# EAGLE board mordomusesp8266 (EAGLE 9.4.2)
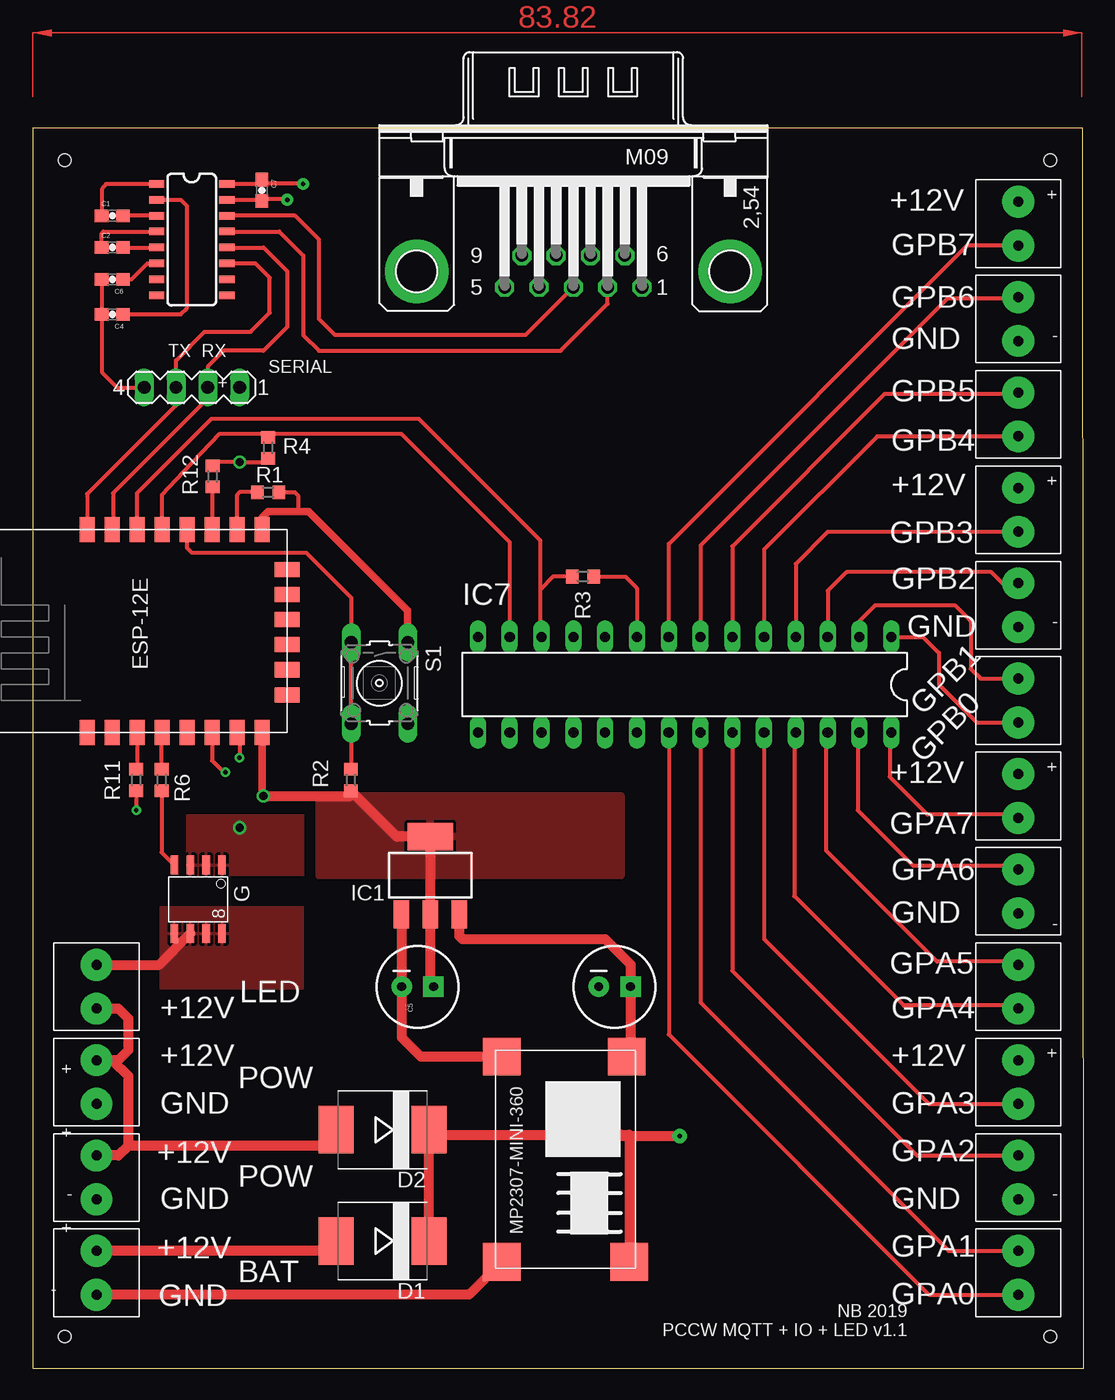
[diagram p0: board, top side]
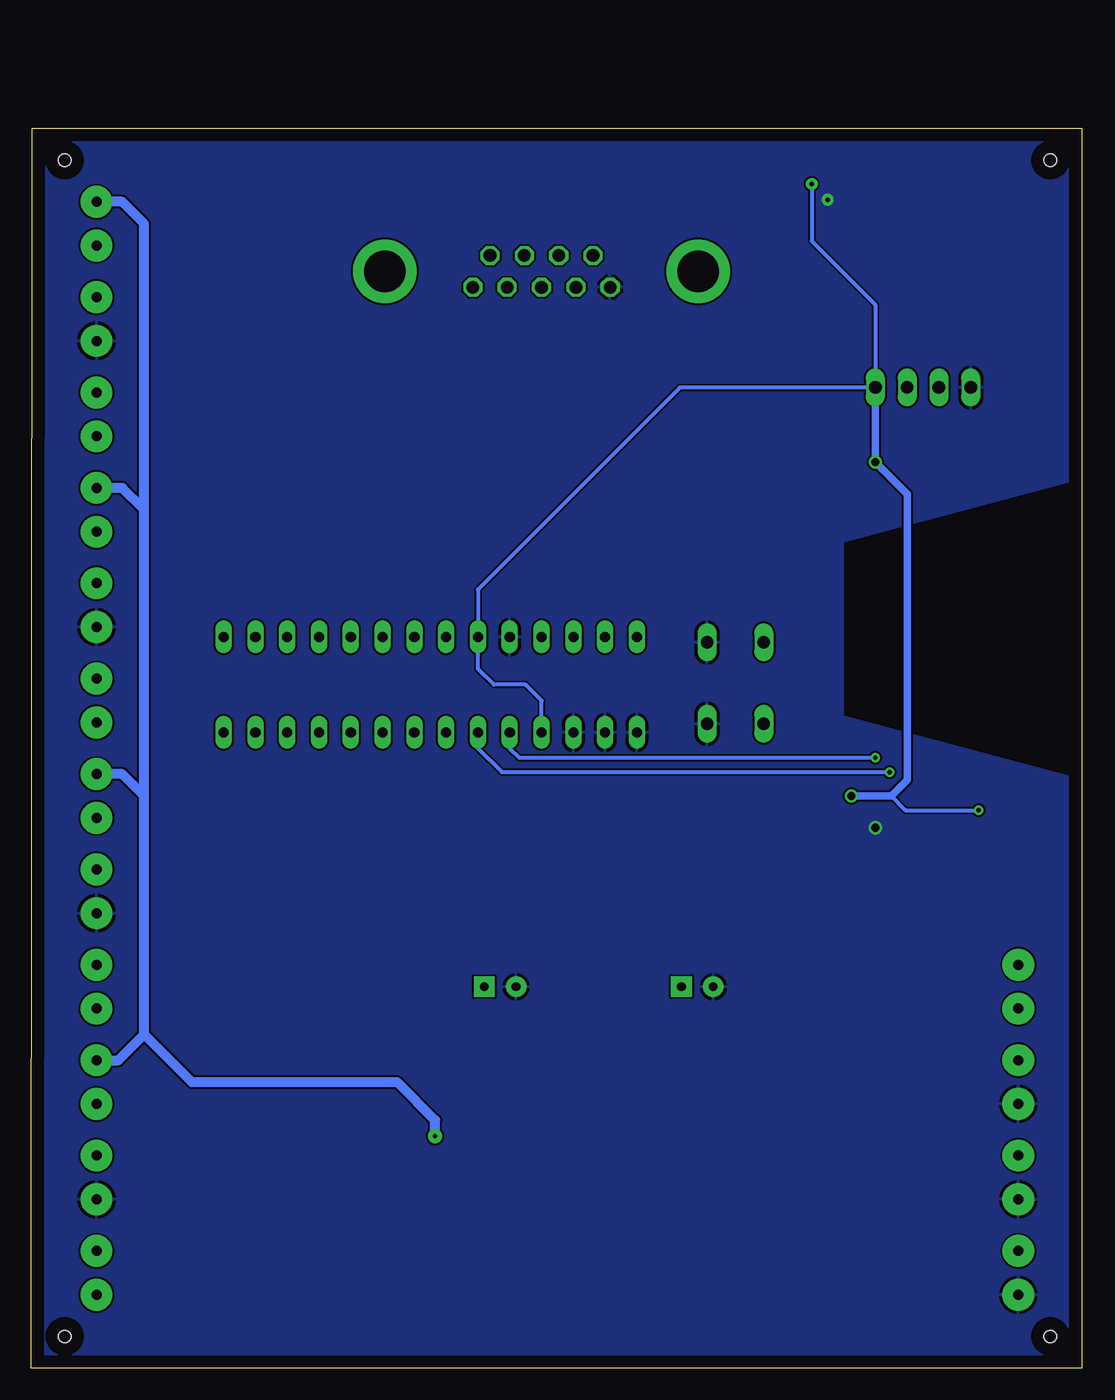
[diagram p1: board, bottom side, seen from below]

Size 83.95 x 99.05 mm. Coordinates in mm from the lower left corner, seen from the top.
Outline: 0,0 83.95,0 83.87,99.05 0,99.05 0,0
Copper layers (1*16): Top 0.035mm / dielectric 1.5mm / Bottom 0.035mm
Design rules "default": minimum track width 6mil, minimum drill 0.35mm, track to track 6mil, track to pad 6mil, pad to pad 6mil, via to via 6mil, smd to smd 6mil, copper to edge 40mil, drill to drill 6mil, minimum pad ring 10mil, minimum via ring 8mil, stop-mask expansion 4mil, vias tented up to drill 0mil, thermal gap 10mil
Net classes: 1 +3v3: width 0.406 mm; 2 GND: width 0.406 mm
Holes 1 mm at 2.54,96.52 81.28,96.52 2.54,2.54 81.28,2.54

## Footprints (pad centres in the part's own frame; a part is rotated, then mirrored left to right if it is on the bottom)
0603-CAP = smd 1.1 x 1: 1 -0.85,0; 2 0.85,0
CPOL-RADIAL-100UF-25V = drill 0.7 pad 1.651 square: 1 1.27,0 | drill 0.7 pad 1.651: 2 -1.27,0
SMC = smd 2.8 x 3.8: A 3.7,0; C -3.7,0
ESP8266-ESP12E = smd 2 x 1.2: 1 -7.62,5.84; 2 -7.62,3.84; 3 -7.62,1.84; 4 -7.62,-0.16; 5 -7.62,-2.16; 6 -7.62,-4.16; 7 -7.62,-6.16; 8 -7.62,-8.16; 9 8.58,-8.16; 10 8.58,-6.16; 11 8.58,-4.16; 12 8.58,-2.16; 13 8.58,-0.16; 14 8.58,1.84; 15 8.58,3.84; 16 8.58,5.84 | smd 1.2 x 2: 17 -4.62,-10.16; 18 -2.62,-10.16; 19 -0.62,-10.16; 20 1.38,-10.16; 21 3.38,-10.16; 22 5.38,-10.16
SO-8 = smd 1.524 x 0.61: 1 -2.743,1.905; 2 -2.743,0.635; 3 -2.743,-0.635; 4 -2.743,-1.905; 5 2.743,-1.905; 6 2.743,-0.635; 7 2.743,0.635; 8 2.743,1.905
SOT223 = smd 1.219 x 2.235: 1 -2.311,-3.099; 2 0,-3.099; 3 2.311,-3.099 | smd 3.6 x 2.2: TAB 0,3.099
DIL28-3 = drill 0.813 long: 1 -16.51,-3.81; 2 -13.97,-3.81; 3 -11.43,-3.81; 4 -8.89,-3.81; 5 -6.35,-3.81; 6 -3.81,-3.81; 7 -1.27,-3.81; 8 1.27,-3.81; 9 3.81,-3.81; 10 6.35,-3.81; 11 8.89,-3.81; 12 11.43,-3.81; 13 13.97,-3.81; 14 16.51,-3.81; 15 16.51,3.81; 16 13.97,3.81; 17 11.43,3.81; 18 8.89,3.81; 19 6.35,3.81; 20 3.81,3.81; 21 1.27,3.81; 22 -1.27,3.81; 23 -3.81,3.81; 24 -6.35,3.81; 25 -8.89,3.81; 26 -11.43,3.81; 27 -13.97,3.81; 28 -16.51,3.81
MP2307-MINI-360 = smd 3 x 3: 3.3V 0.5,10.5; 12V 16.9,10.7; GND@1 16.9,0.5; GND@2 0.5,0.5
KF350-2P = drill 0.8 pad 2.54: 1 -1.75,0; 2 1.75,0
R0603 = smd 1 x 1.1: 1 -0.85,0; 2 0.85,0
B3F-10XX = drill 1.016 long: 1 -3.251,2.261; 2 3.251,2.261; 3 -3.251,-2.261; 4 3.251,-2.261
MA04-1 = drill 1.016 long: 1 -3.81,0; 2 -1.27,0; 3 1.27,0; 4 3.81,0
SO016 = smd 0.6 x 1.2: 1 -4.445,-2.8; 2 -3.175,-2.8; 3 -1.905,-2.8; 4 -0.635,-2.8; 5 0.635,-2.8; 6 1.905,-2.8; 7 3.175,-2.8; 8 4.445,-2.8; 9 4.445,2.8; 10 3.175,2.8; 11 1.905,2.8; 12 0.635,2.8; 13 -0.635,2.8; 14 -1.905,2.8; 15 -3.175,2.8; 16 -4.445,2.8
M09HP = drill 1.016 octagon: 1 5.486,-1.27; 2 2.743,-1.27; 3 0,-1.27; 4 -2.743,-1.27; 5 -5.486,-1.27; 6 4.115,1.27; 7 1.372,1.27; 8 -1.372,1.27; 9 -4.115,1.27 | drill 3.302 pad 5.08: G1 12.522,0; G2 -12.522,0

## Placement (x,y rotation side)
C1  .1uF  [0603-CAP]  6.35,92.08 0 top
C2  .1uF  [0603-CAP]  6.35,89.53 0 top
C3  [CPOL-RADIAL-100UF-25V]  46.48,30.48 0 top
C4  .1uF  [0603-CAP]  6.35,84.2 180 top
C5  [CPOL-RADIAL-100UF-25V]  30.73,30.48 0 top
C6  .1uF  [0603-CAP]  6.35,87 180 top
C7  .1uF  [0603-CAP]  18.29,94.11 270 top
D1  [SMC]  27.94,10.16 180 top
D2  [SMC]  27.94,19.05 180 top
ESP  [ESP8266-ESP12E]  10.16,58.42 90 top
G  [SO-8]  13.21,37.47 270 top
IC1  LM1117MPX-3.3  [SOT223]  31.75,39.37 0 top
IC7  MCP23017SP  [DIL28-3]  52.07,54.61 180 top
PWR1  MP2307-MINI-360  [MP2307-MINI-360]  36.96,25.4 270 top
PWR_IN  KF350-P2  [KF350-2P]  5.08,15.24 90 top
PWR_IN1  KF350-P2  [KF350-2P]  5.08,30.48 270 top
PWR_IN2  KF350-P2  [KF350-2P]  78.74,38.1 90 top
PWR_IN3  KF350-P2  [KF350-2P]  78.74,30.48 270 top
PWR_IN4  KF350-P2  [KF350-2P]  78.74,91.44 90 top
PWR_IN5  KF350-P2  [KF350-2P]  78.74,60.96 90 top
PWR_IN6  KF350-P2  [KF350-2P]  78.74,53.34 270 top
PWR_IN7  KF350-P2  [KF350-2P]  78.74,68.58 90 top
PWR_IN8  KF350-P2  [KF350-2P]  78.74,83.82 90 top
PWR_IN9  KF350-P2  [KF350-2P]  78.74,76.2 270 top
PWR_IN10  KF350-P2  [KF350-2P]  78.74,45.72 90 top
PWR_IN11  KF350-P2  [KF350-2P]  78.74,7.62 90 top
PWR_IN12  KF350-P2  [KF350-2P]  78.74,15.24 90 top
PWR_IN13  KF350-P2  [KF350-2P]  78.74,22.86 90 top
PWR_IN14  KF350-P2  [KF350-2P]  5.08,22.86 90 top
PWR_INBAT  KF350-P2  [KF350-2P]  5.08,7.62 90 top
R1  10K  [R0603]  18.8,69.98 0 top
R2  10K  [R0603]  25.4,46.99 90 top
R3  10K  [R0603]  43.94,63.25 0 top
R4  10K  [R0603]  18.8,73.53 270 top
R6  10K  [R0603]  10.29,46.99 270 top
R11  10K  [R0603]  8.25,46.99 90 top
R12  10K  [R0603]  14.35,71.25 270 top
S1  [B3F-10XX]  27.69,54.74 270 top
SERIAL  [MA04-1]  12.7,78.36 180 top
U2  MAX3232  [SO016]  12.7,90.17 270 top
X1  [M09HP]  43.18,87.63 0 top

## Library data of the parts
C1 C2 C4 C6 C7 = SparkFun-Capacitors; PROD_ID: CAP-00810; SPARKLE_ID: 918
C3 C5 = SparkFun-Capacitors; PROD_ID: CAP-08439
D1 D2 = diode
ESP = ESP8266-ESP12E
G = transistor-fet
IC1 = lm1117
IC7 = microchip-6
PWR1 = MP2307-MINI-360
PWR_IN PWR_IN1-PWR_IN14 PWR_INBAT = KF350-P2
R1-R4 R6 R11 R12 = resistor
S1 = switch-omron; MPN: B3F-1000; OC_FARNELL: 176432; OC_NEWARK: 36M3542
SERIAL = con-lstb; OC_FARNELL: unknown; OC_NEWARK: unknown
U2 = SparkFun-DigitalIC; PROD_ID: IC-08171
X1 = con-subd

## Nets
+3V3: C5.1 C7.1 ESP.8 IC1.2 IC1.TAB IC7.9 IC7.18 R2.1 R3.2 R4.2 R11.1 R12.1 SERIAL.1 U2.16
C1+: C1.1 U2.1
C1-: C1.2 U2.3
C2+: C2.1 U2.4
C2-: C2.2 U2.5
DG: G.5 G.6 G.7 G.8 PWR_IN1.1
GND: C3.2 C4.2 C5.2 C6.2 C7.2 ESP.9 G.1 G.2 G.3 IC1.1 IC7.10 IC7.15 IC7.16 IC7.17 PWR1.GND@1 PWR1.GND@2 PWR_IN2.1 PWR_IN5.1 PWR_IN8.1 PWR_IN12.1 PWR_IN14.1 PWR_IN.1 PWR_INBAT.1 R1.2 S1.1 S1.2 SERIAL.4 U2.15 X1.5
GPA0: IC7.21 PWR_IN11.1
GPA1: IC7.22 PWR_IN11.2
GPA2: IC7.23 PWR_IN12.2
GPA3: IC7.24 PWR_IN13.1
GPA4: IC7.25 PWR_IN3.2
GPA5: IC7.26 PWR_IN3.1
GPA6: IC7.27 PWR_IN2.2
GPA7: IC7.28 PWR_IN10.1
GPB0: IC7.1 PWR_IN6.2
GPB1: IC7.2 PWR_IN6.1
GPB2: IC7.3 PWR_IN5.2
GPB3: IC7.4 PWR_IN7.1
GPB4: IC7.5 PWR_IN9.2
GPB5: IC7.6 PWR_IN9.1
GPB6: IC7.7 PWR_IN8.2
GPB7: IC7.8 PWR_IN4.1
INTA: ESP.6 IC7.20
INTB: ESP.7 IC7.19
N$2: ESP.10 R1.1
N$3: ESP.3 R11.2
N$4: ESP.11 R12.2
N$5: G.4 R6.2
PROG: ESP.12 R2.2 S1.3 S1.4
RS232RX: U2.13 X1.2
RS232TX: U2.14 X1.3
RVCC: C3.1 IC1.3 PWR1.3.3V
RX: ESP.15 SERIAL.2 U2.12
SCL: ESP.14 IC7.12 R3.1
SDA: ESP.13 IC7.13 R4.1
TX: ESP.16 SERIAL.3 U2.11
V+: C4.1 U2.2
V-: C6.1 U2.6
VDD: D2.A PWR_IN1.2 PWR_IN14.2 PWR_IN.2
VDDBAT: D1.A PWR_INBAT.2
VDDR: D1.C D2.C PWR1.12V PWR_IN4.2 PWR_IN7.2 PWR_IN10.2 PWR_IN13.2
W: ESP.4 R6.1

## Tracks (layer width: path | path; a pad name or v marks a point on that pad's centre or on a via)
+3V3  (via drill 0.35, 0.35 pad 0.95, 0.65 pad 0.65)
  Top 0.305: R11.1 v8.25,44.58 | R12.1 14.35,72.39 v16.51,72.39 18.5,72.39 R4.2 | v21.59,94.61 18.63,94.61 C7.1 17.95,94.61 U2.16 | R3.2 47.33,63.25 48.26,62.32 IC7.9
  Top 0.61: ESP.8 18.32,45.81 v18.41,45.72
  Top 0.813: C5.1 31.75,30.73 IC1.2 IC1.TAB 29.07,42.47 R2.1 25.4,45.72 v18.41,45.72
  Bottom 0.305: v8.25,44.58 14.1,44.58 15.24,45.72 | v21.59,94.61 21.59,90.04 16.51,84.96 SERIAL.1 32.13,78.36 48.26,62.23 IC7.9 48.26,55.88 46.99,54.61 44.45,54.61 43.18,53.34 IC7.18
  Bottom 0.61: SERIAL.1 v16.51,72.39 13.97,69.85 13.97,46.99 15.24,45.72 v18.41,45.72
  pour Top: 22.86,45.72 46.99,45.72 46.99,39.37 22.86,39.37
C1+
  Top 0.305: U2.1 5.86,94.61 5.5,94.18 C1.1
C1-
  Top 0.305: U2.3 C1.2
C2+
  Top 0.305: U2.4 5.63,90.8 5.5,90.68 C2.1
C2-
  Top 0.305: C2.2 U2.5
DG
  Top 0.813: PWR_IN1.1 10.08,32.23 G.6
  pour Top: 10.16,36.83 10.16,30.35 21.59,30.35 21.59,36.83
GND  (via drill 0.35 pad 0.95, 0.65 pad 0.65)
  Top 0.152: 29.44,30.51 C5.2 | 18.32,67.31 ESP.9 | 21.17,68.45 18.8,68.45
  Top 0.305: R1.2 20.92,69.98 21.17,69.72 21.17,68.45 | U2.15 18.2,93.34 C7.2 18.41,93.38 20.28,93.38 v20.32,93.34 | C6.2 C4.2 5.5,79.59 6.73,78.36 SERIAL.4
  Top 0.61: 18.32,67.31 18.32,67.98 18.8,68.45 22.02,68.45 29.95,60.53 S1.1
  Top 0.813: IC1.1 29.44,30.51 | C5.2 29.46,26.42 30.98,24.9 PWR1.GND@2 | PWR1.GND@1 34.83,5.87 PWR_INBAT.1
  other vias: 16.51,43.18
  pour Bottom: 0,99.06 83.82,99.06 83.82,0 0,0 0,46.99 19.05,52.07 19.05,66.04 0,71.12
  pour Top: 12.32,44.2 21.59,44.2 21.59,39.37 12.32,39.37
GPA0
  Top 0.305: IC7.21 50.8,26.67 71.6,5.87 PWR_IN11.1
GPA1
  Top 0.305: IC7.22 53.34,29.21 73.18,9.37 PWR_IN11.2
  Bottom 0.152: 78.71,9.4 PWR_IN11.2
GPA2
  Top 0.305: IC7.23 55.88,31.75 70.64,16.99 PWR_IN12.2
GPA3
  Top 0.305: PWR_IN13.1 71.6,21.11 58.42,34.29 IC7.24
GPA4
  Top 0.305: PWR_IN3.2 78.49,28.98 69.57,28.98 60.83,37.72 60.83,50.67 IC7.25
GPA5
  Top 0.305: PWR_IN3.1 78.49,32.48 72.24,32.48 63.37,41.35 63.37,50.67 IC7.26
GPA6
  Top 0.152: 78.23,40.13 PWR_IN2.2
  Top 0.305: 78.23,40.13 70.36,40.13 65.91,44.58 65.91,50.67 IC7.27
GPA7
  Top 0.305: PWR_IN10.1 78.49,44.22 71.47,44.22 68.45,47.24 68.45,50.67 IC7.28
GPB0
  Top 0.305: PWR_IN6.2 75.41,51.59 72.39,54.61 72.39,57.15 71.12,58.42 IC7.1
GPB1
  Top 0.305: PWR_IN6.1 75.72,55.09 74.93,55.88 74.93,59.69 73.66,60.96 67.31,60.96 66.04,59.69 IC7.2
GPB2
  Top 0.152: 63.56,62.17 63.5,62.1
  Top 0.305: 63.56,62.17 65,63.6 76.58,63.6 77.47,62.71 PWR_IN5.2 | 63.5,62.1 IC7.3
GPB3
  Top 0.305: PWR_IN7.1 63.53,66.83 60.96,64.26 IC7.4
GPB4
  Top 0.152: PWR_IN9.2
  Top 0.305: IC7.5 58.42,65.41 67.46,74.45 PWR_IN9.2
GPB5
  Top 0.152: 78.69,77.83 PWR_IN9.1
  Top 0.305: 78.69,77.83 68.05,77.83 55.88,65.66 IC7.6
GPB6
  Top 0.152: 78.69,85.45 PWR_IN8.2
  Top 0.305: IC7.7 53.34,65.73 73.05,85.45 78.69,85.45
GPB7
  Top 0.305: PWR_IN4.1 74.63,89.69 50.8,65.86 IC7.8
INTA  (via drill 0.35)
  Top 0.305: ESP.6 14.32,48.55 15.24,47.62 v15.37,47.62
  Bottom 0.305: IC7.20 48.26,49.53 46.35,47.62 v15.37,47.62
INTB  (via drill 0.35)
  Top 0.152: ESP.7 16.51,50.61
  Top 0.305: 16.51,50.61 v16.51,48.77
  Bottom 0.305: v16.51,48.77 44.96,48.77 45.72,49.53 IC7.19
N$2
  Top 0.305: ESP.10 16.32,69.79 16.51,69.98 R1.1
N$3
  Top 0.152: 8.32,47.91 R11.2
  Top 0.305: ESP.3 8.32,47.91
N$4
  Top 0.152: R12.2 14.32,70.37
  Top 0.305: 14.32,70.37 ESP.11
N$5
  Top 0.305: R6.2 10.29,41.22 G.4
PROG
  Top 0.152: R2.2 25.42,47.87
  Top 0.305: 25.42,47.87 S1.4 S1.3 25.42,61.57 21.84,65.15 12.7,65.15 12.32,65.53 ESP.12
RS232RX
  Top 0.305: X1.2 45.92,85.04 42.16,81.28 22.86,81.28 21.59,82.55 21.59,88.9 19.69,90.8 U2.13
RS232TX
  Top 0.305: X1.3 39.37,82.55 24.13,82.55 22.86,83.82 22.86,90.17 20.95,92.08 U2.14
RVCC
  Top 0.813: IC1.3 34.06,34.52 34.29,34.29 45.72,34.29 47.75,32.26 C3.1 47.75,25.2 PWR1.3.3V
RX
  Top 0.152: 6.4,67 ESP.15
  Top 0.305: 6.4,67 6.4,69.9 13.97,77.47 SERIAL.2 13.97,80.01 15.24,81.28 18.41,81.28 20.32,83.19 20.32,87.63 18.41,89.53 U2.12
SCL
  Top 0.152: 40.54,58.47 IC7.12
  Top 0.305: 40.54,58.47 40.54,62.23 | 40.54,62.23 40.54,66.14 30.82,75.86 14.26,75.86 8.32,69.92 ESP.14 | R3.1 41.55,63.25 40.54,62.23
SDA
  Top 0.305: ESP.13 10.32,69.79 12.07,71.63 14.94,74.66 18.8,74.66 | IC7.13 38.1,65.99 29.43,74.66 18.8,74.66 | R4.1 18.8,74.66
TX
  Top 0.305: ESP.16 4.32,69.85 11.43,76.96 SERIAL.3 11.43,80.52 13.72,82.8 17.4,82.8 18.92,84.33 18.92,87.12 17.78,88.27 U2.11
V+
  Top 0.305: U2.2 11.81,93.34 12.32,92.84 12.32,84.71 11.81,84.2 C4.1
V-
  Top 0.305: C6.1 7.87,87 9.14,88.27 U2.6
VDD
  Top 0.813: PWR_IN1.2 6.83,28.73 7.62,27.94 7.62,25.4 6.83,24.61 6.35,24.61 | PWR_IN14.2 6.35,24.61 | 6.35,24.61 7.62,23.34 7.62,17.78 | 7.62,17.78 6.83,16.99 PWR_IN.2 | D2.A 22.97,17.78 7.62,17.78
VDDBAT
  Top 0.813: PWR_INBAT.2 5.11,9.4 23.48,9.4 D1.A
VDDR  (via drill 0.35 pad 1.15)
  Top 0.813: D1.C D2.C 32.03,18.66 46.99,18.66 | PWR1.12V 47.66,18.66 46.99,18.66 | v51.69,18.54 47.11,18.54 46.99,18.66
  Bottom 0.813: PWR_IN13.2 76.99,24.61 74.93,26.67 | 74.93,26.67 74.93,45.72 | 74.93,45.72 76.68,47.47 PWR_IN10.2 | 74.93,45.72 74.93,68.58 | 74.93,68.58 76.68,70.33 PWR_IN7.2 | 74.93,68.58 74.93,91.44 76.68,93.19 PWR_IN4.2 | v51.69,18.54 51.69,19.81 54.74,22.86 71.12,22.86 74.93,26.67
W
  Top 0.152: ESP.4 10.21,50.69 10.29,50.62
  Top 0.305: R6.1 10.29,50.62
(copper drawn outside any net)
  shapes: Top area x2

## Text on the board
tPlace: + | - | TX | RX | SERIAL | + | + | - | + | - | LED | + | + | POW | + | POW | - | - | + | BAT | - | NB 2019 / PCCW MQTT + IO + LED v1.1
tNames: +12V | GPB7 | GPB6 | GND | GPB5 | GPB4 | +12V | GPB3 | GPB2 | GND | GPB1 | GPB0 | +12V | GPA7 | GPA6 | GND | GPA5 | +12V | GPA4 | +12V | +12V | GND | GPA3 | GPA2 | +12V | GND | GND | +12V | GPA1 | GND | GPA0